# Altium PCB ADCConvert.PcbDoc
Units mm, origin at the board's own origin, x right, y up, seen from the top; angles counter-clockwise.
Board outline 63.5 x 53.34 mm, 2 copper layers (Top Layer, Bottom Layer); 26 components, 19 nets, 70 pads, 4 vias.
Unrouted connection lines stored in the file: 1.
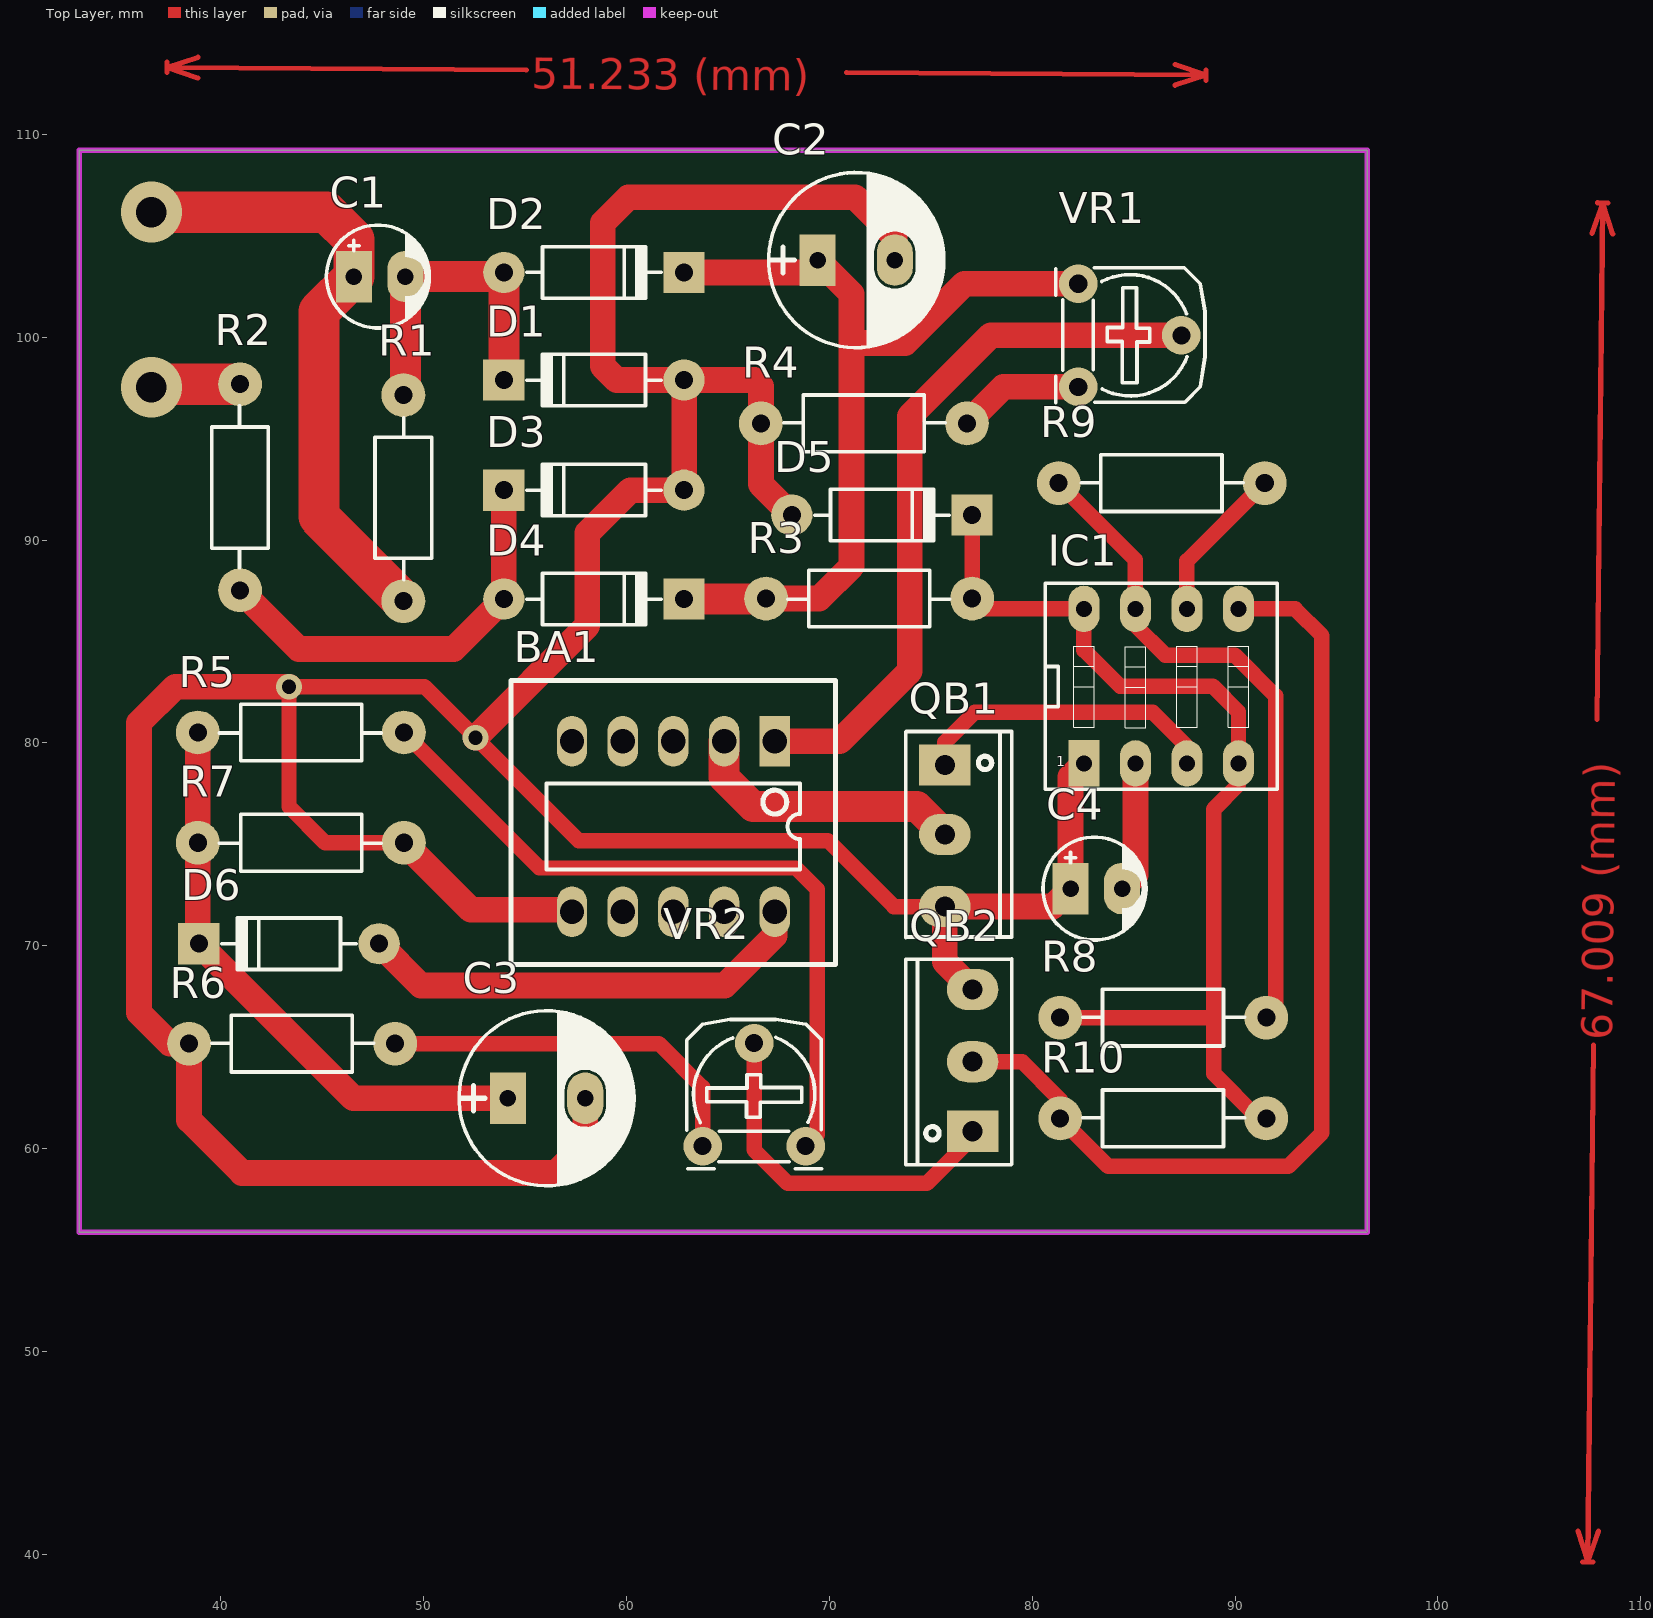
[diagram p0: Top Layer view]
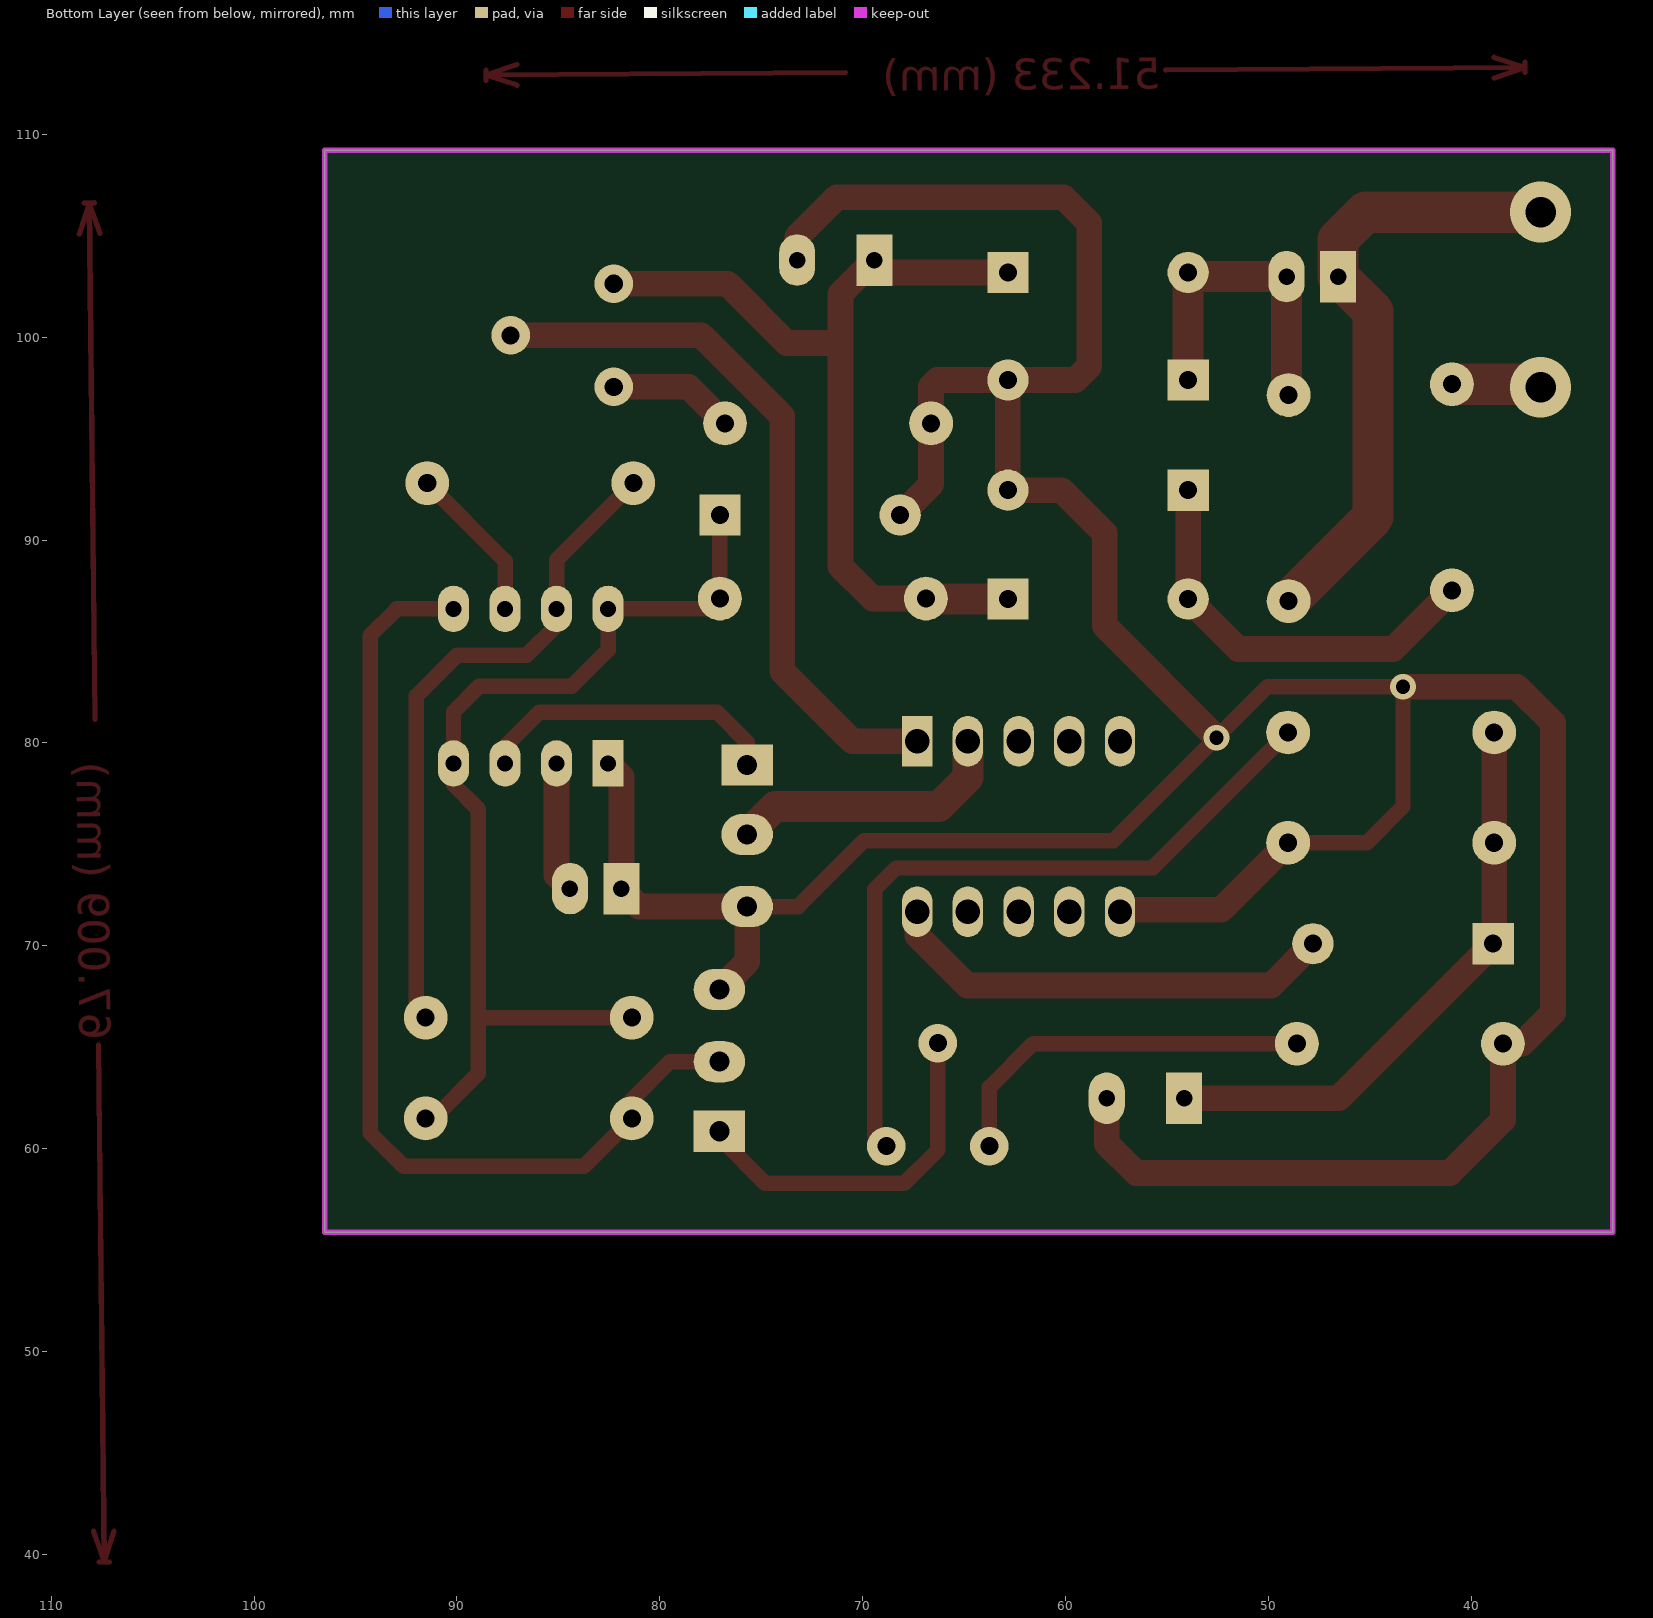
[diagram p1: Bottom Layer view, seen from below]
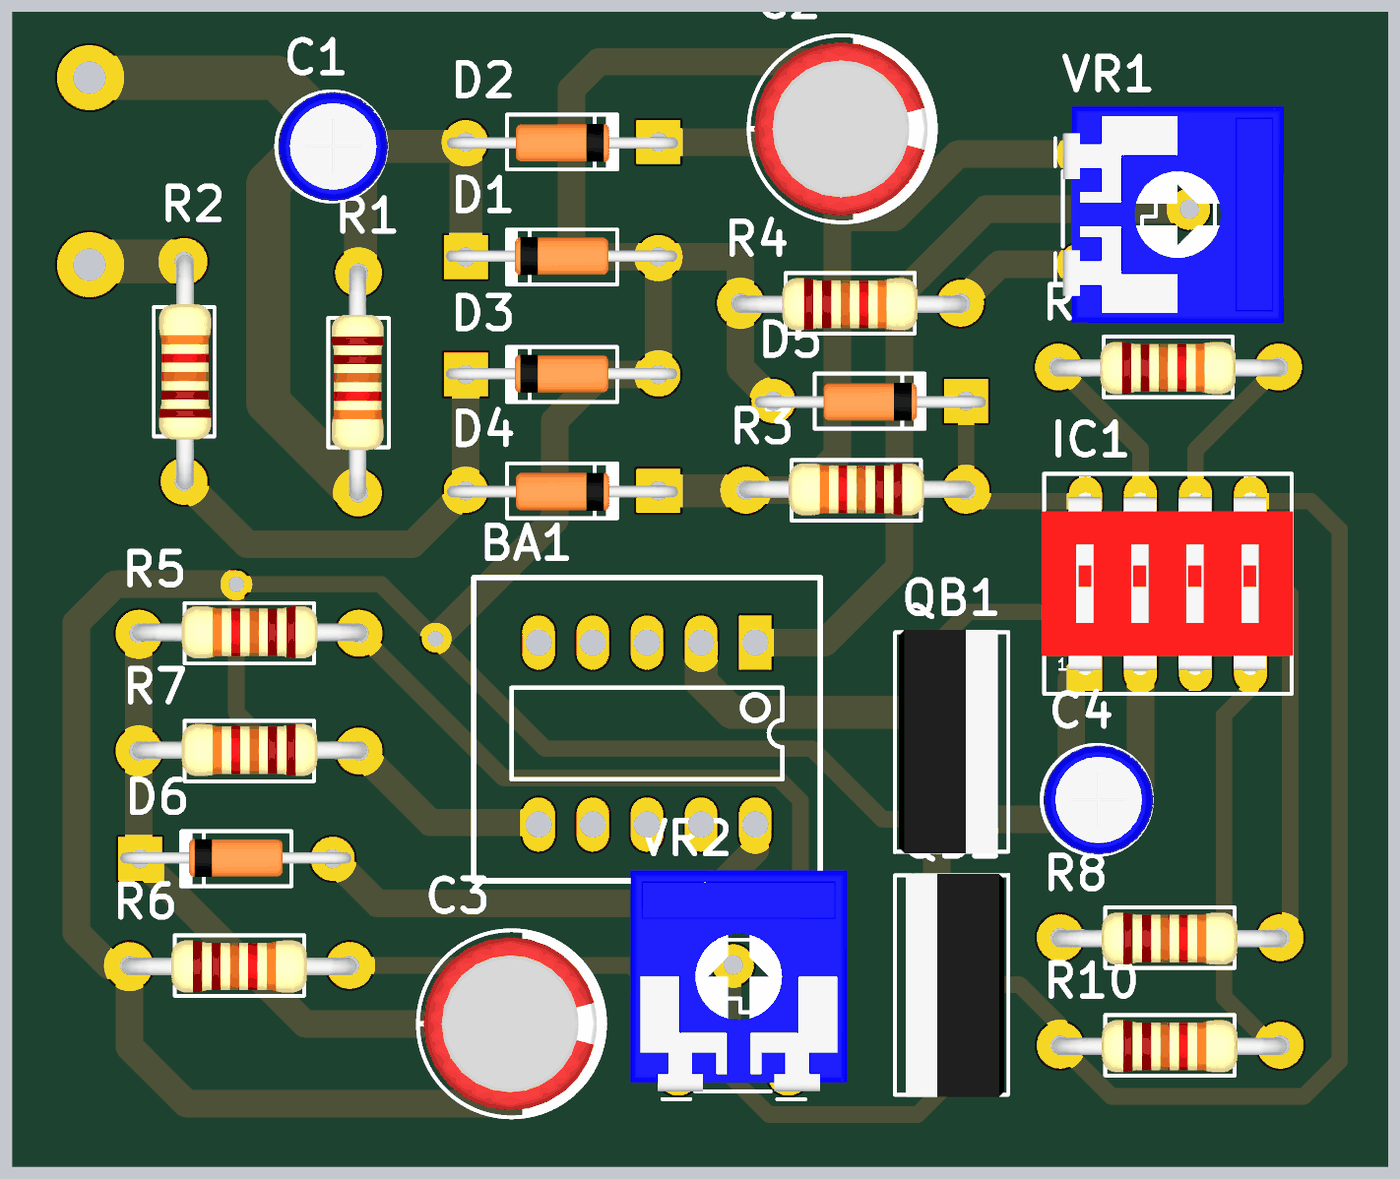
[diagram p2: 3D render of the assembled board from above, using the file's embedded part models]

## Layer stack, top to bottom
Top Solder: solder mask 0.0102, Solder Resist, Dk 3.5
Top Layer: signal copper 0.0356
Dielectric 1: dielectric 0.32, FR-4, Dk 4.8
Bottom Layer: signal copper 0.0356
Bottom Solder: solder mask 0.0102, Solder Resist, Dk 3.5

## Board outline
33.02,55.88 96.52,55.88 96.52,109.22 33.02,109.22

## Design rules (kind name [scope] priority, off if disabled: settings)
Clearance [All] p1: gap=0.254
PolygonConnect [All] p1: connectstyle=Relief reliefconductorwidth=0.254 reliefentries=4 polygonreliefangle="90 Angle" airgapwidth=0.254
RoomDefinition ADCConvert [InComponentClass('ADCConvert')] p1: confinementstyle=ConfineIn formatcopy=TRUE lockcomponents=FALSE outline 0,0 50.8,0 50.8,25.4 0,25.4
RoutingVias [All] p1: holewidth=0.711 width=1.27 viastyle="Through Hole" minholewidth=0.711 minwidth=1.27 maxholewidth=0.711 maxwidth=1.27
SolderMaskExpansion [All] p1: expansion=0.102
Width N1 [InNet('N1')] p1: maxlimit=0.762 minlimit=0.762 preferedwidth=0.762
Width V1 [InNet('V1')] p2: maxlimit=1.27 minlimit=1.27 preferedwidth=1.27
Width V2 [InNet('V2')] p3: maxlimit=1.27 minlimit=1.27 preferedwidth=1.27
Width V7 [InNet('V7')] p4: maxlimit=1.524 minlimit=1.524 preferedwidth=1.524
Width V6 [InNet('V6')] p5: maxlimit=1.524 minlimit=1.524 preferedwidth=1.524
Width V5 [InNet('V5')] p6: maxlimit=1.524 minlimit=1.524 preferedwidth=1.524
Width V4 [InNet('V4')] p7: maxlimit=1.524 minlimit=1.524 preferedwidth=1.524
Width V3 [InNet('V3')] p8: maxlimit=1.524 minlimit=1.524 preferedwidth=1.524
Width V- [InNet('V-')] p9: maxlimit=2.032 minlimit=2.032 preferedwidth=2.032
Width V+ [InNet('V+')] p10: maxlimit=2.032 minlimit=2.032 preferedwidth=2.032
Width [All] p11: maxlimit=1.27 minlimit=0.762 preferedwidth=1.27
30 further rules are at their usual default settings.

## Components (designator, comment, footprint, x,y, rotation, side; value= is the part's Value field where it differs from the comment)
BA1 "EE13" EE1BA 67.31,80.086 r270 top
C1 "220uF/450V" CP1/2 46.558,102.997 r0 top
C2 "220uF/450V" CP1.5/3.4 69.418,103.81 r0 top
C3 "220uF/450V" CP1.5/3.4 54.153,62.484 r0 top
C4 "104" CP1/2 81.89,72.822 r0 top
D1 "1N4007" D1A 62.84,97.892 r0 top
D2 "1N4007" D1A 53.95,103.2 r180 top
D3 "1N4007" D1A 62.84,92.464 r0 top
D4 "1N4007" D1A 53.95,87.097 r180 top
D5 "1N4007" D1A 68.148,91.237 r180 top
D6 "1N4007" D1A 47.803,70.104 r0 top
IC1 "NE555" DIP8/W0.3K 82.55,78.994 r0 top
QB1 "D718" QTO-220T 75.692,78.029 r270 top
QB2 "D718" QTO-220T 77.064,61.747 r90 top
R1 "1k" R1/2W 48.997,86.995 r90 top
R2 "1k" R1/2W 40.945,97.688 r270 top
R3 "1k" R1/2W 66.878,87.122 r0 top
R4 "1k" R1/2W 76.784,95.758 r180 top
R5 "1k" R1/2W 38.862,80.518 r0 top
R6 "1k" R1/2W 48.59,65.176 r180 top
R7 "1k" R1/2W 38.862,75.082 r0 top
R8 "1k" R1/2W 91.542,66.459 r180 top
R9 "1k" R1/2W 91.465,92.812 r180 top
R10 "1k" R1/2W 91.542,61.493 r180 top
VR1 "10K" VR 82.271,102.641 r270 top
VR2 "10K" VR 63.754,60.122 r0 top

## Footprints (in the part's own frame and the unit in brackets; to place one, negate y for a bottom-side part, rotate by r counter-clockwise, add the part's x,y. Pads: shape width x height; smd on the part's side, far side on the other; paste and mask are expansions set on the pad)
CP1.5/3.4 [mil] "Tu hoa 220->470uF,16V, 470uF/16V,25V"
  rect 70x100 hole 32: 1(0,0)
  oval 70x100 hole 32: 2(150,0)
  silkscreen extent -95,-170 245,170, body extent -85,-157 230,157, height 446
CP1/2 [mil] "Tu hoa < 22uF/16>50V"
  rect 70x100 hole 32: 1(0,0)
  oval 70x100 hole 32: 2(100,0)
  silkscreen extent -53,-100 147,100, body extent -49,-99 149,99, height 287
D1A [mil] "Diode 1A, W 100mil, L 350mil"
  round 80 hole 35: 1(0,0)
  rect 80x80 hole 35: 2(-350,0)
  silkscreen extent -305,-50 -45,50, body extent -386,-33 34,36, height 84
DIP8/W0.3K [mil] "8 PIN, W 400mil , L 450mil, Pin to pin 100mil For Switch"
  rect 60x90 hole 31: 1(0,0)
  oval 60x90 hole 31: 2(100,0) 3(200,0) 4(300,0) 5(300,300) 6(200,300) 7(100,300) 8(0,300)
  silkscreen extent -75,-50 375,350, body extent -80,-45 378,345, height 158
EE1BA [mm] "DIP10"
  rect 2.5x1.5 hole 1.2: 1(0,0)
  oval 2.5x1.5 hole 1.2: 2(0,-2.5) 3(0,-5) 4(0,-7.5) 5(0,-10) 6(8.4,-10) 7(8.4,-7.5) 8(8.4,-5) 9(8.4,-2.5) 10(8.4,0)
  silkscreen extent -3,-13 11,3
QTO-220T [mil] "TO-220 - 1-2-3"
  rect 80x100 hole 39: 1(-35,0)
  oval 80x100 hole 39: 2(100,0) 3(240,0)
  silkscreen extent -100,-76 300,130, body extent -104,-69 302,108, height 623
R1/2W [mil] "R 1/2W, 2 pin, 300mil"
  round 85 hole 35: 1(0,0) 2(400,0)
  silkscreen extent 42,-55 356,55, body extent -12,-45 414,49, height 91
VR [mil] "Resistor Variable"
  round 75 hole 35: 1(0,0) 2(100,200) 3(200,0)
  silkscreen extent -31,-44 231,246, body extent -87,-30 307,372, height 165

## Part data
BA1: library part EE13-Tranformer
C1 C2 C3: library part CP9, "Cap 10000uF/63V"
C4: library part CN2, "Cap np 104 => 105pF"
D1 D2 D3 D4 D5 D6: library part D1A, "Diode 1A"
QB1 QB2: "Transistor Power Supply"
R1 R2 R3 R4 R5 R6 R7 R8 R9 R10: library part R, "Resistor 1/4W"
VR1 VR2: library part VR, "Var Resistor"

## Via types
v1: diameter 1.27, hole 0.711, Top Layer to Bottom Layer, 2 vias
v2: diameter 3, hole 1.5, Top Layer to Bottom Layer, 2 vias

## Nets (pads, with @x,y where several pads share a name; then routed paths per layer and width w, separated by ;. In a path a pad name is that pad's centre, name@x,y a point inside that pad or via, vN(x,y) a via of type N, cw(c..) or ccw(c..) an arc to the next point about the centre after c; other vN are vias at no path point)
GND: BA1.6 C2.2 C3.2 C4.1 D1.1 D3.1 D5.1 IC1.1 QB1.3 QB2.3 R4.2 R6.2 R7.2 | length 191.8
  Top Layer w0.762: R7.2 45.136,75.082 43.358,76.86 v1(43.358,82.779) 50.038,82.779 v1(52.553,80.264) 57.633,75.184 69.926,75.184 73.177,71.933 QB1.3
  Top Layer w1.27: v1(43.358,82.779) 37.744,82.779 35.966,81.001 35.966,66.7 37.49,65.176 R6.2 38.43,61.417 41.046,58.801 56.515,58.801 57.963,60.249 C3.2 ; R7.2 52.324,71.78 57.216,71.78 BA1.6 ; v1(52.553,80.264) 58.064,85.776 58.064,90.348 60.181,92.464 D3.1 D1.1 ; D5.1 66.624,92.761 R4.2 66.624,97.587 66.319,97.892 D1.1 ; C2.2 73.228,104.953 71.272,106.909 60.096,106.909 58.826,105.639 58.826,98.577 59.512,97.892 D1.1 ; QB2.3 75.692,69.215 QB1.3 81.001,71.933 C4.1 81.89,78.334 IC1.1
N1: D5.2 IC1.4 IC1.8 R3.2 R8.2 R10.1 | length 50.2
  Top Layer w0.762: D5.2 R3.2 77.546,86.614 IC1.8 82.55,84.582 84.328,82.804 88.9,82.804 90.17,81.534 IC1.4 90.17,77.953 88.951,76.733 88.951,66.446 ; R8.2 88.938,66.459 88.951,66.446 ; R10.1 91.161,61.493 88.951,63.703 88.951,66.446
N2: IC1.3 QB1.1 | length 15.2
  Top Layer w0.762: QB1.1 75.692,80.035 77.165,81.509 85.954,81.509 87.63,79.832 IC1.3
N3: QB2.1 VR2.2 | length 18
  Top Layer w0.762: VR2.2 66.294,59.944 67.945,58.293 74.803,58.293 77.064,60.554 QB2.1
NetC4_2: C4.2 IC1.2 IC1.6 R9.1 | length 14.2
  Top Layer w0.762: IC1.6 87.63,88.976 R9.1
  Top Layer w1.27: C4.2 85.09,73.482 IC1.2
NetIC1_5: IC1.5 QB2.2 R10.2 | length 49.7
  Top Layer w0.762: QB2.2 79.502,64.287 81.382,62.408 R10.2 83.744,59.131 92.634,59.131 94.285,60.782 94.285,85.293 92.964,86.614 IC1.5
NetIC1_7: IC1.7 R8.1 R9.2 | length 33
  Top Layer w0.762: R9.2 85.09,89.027 IC1.7 85.09,85.801 86.563,84.328 89.992,84.328 91.999,82.321 91.999,66.916 R8.1 R8.1@91.567,66.459
NetR4_1: R4.1 VR1.3 | length 6.2
  Top Layer w1.27: R4.1 78.588,97.561 VR1.3
NetR5_2: R5.2 VR2.3 | length 36.6
  Top Layer w0.762: R5.2 55.702,73.838 68.351,73.838 69.393,72.796 69.393,60.681 VR2.3
  Top Layer w1.27: VR2.3 VR2.3@68.936,60.122
NetR6_1: R6.1 VR2.1 | length 19.4
  Top Layer w0.762: R6.1 61.595,65.176 63.754,63.017 VR2.1
  Top Layer w1.27: R6.1 R6.1@48.92,64.846
V1: BA1.10 D6.1 | length 22.6
  Top Layer w1.27: D6.1 49.86,68.047 64.846,68.047 67.31,70.51 BA1.10
V2: C3.1 D6.2 R5.1 R7.1 | length 28.8
  Top Layer w1.27: R5.1 R7.1 38.862,70.155 D6.2 46.533,62.484 C3.1
V3: C1.2 D1.2 D2.1 R1.2 | length 16.1
  Top Layer w1.524: R1.2 49.098,97.257 C1.2 53.746,102.997 D2.1 D1.2
V4: D3.2 D4.1 R2.2 | length 20.6
  Top Layer w1.27: R2.2 43.84,84.633 51.486,84.633 D4.1 D3.2
V5: C2.1 D2.2 D4.2 R3.1 VR1.1 | length 43.9
  Top Layer w1.27: D2.2 68.809,103.2 C2.1 71.095,102.133 71.095,99.72 ; R3.1 69.494,87.122 71.095,88.722 71.095,99.72 ; VR1.1 76.657,102.641 73.736,99.72 71.095,99.72
  Top Layer w1.524: D4.2 66.853,87.097 R3.1
V6: BA1.1 VR1.2 | length 35.7
  Top Layer w1.27: BA1.1 70.51,80.086 73.965,83.541 73.965,96.114 77.953,100.101 VR1.2
V7: BA1.2 QB1.2 | length 13.8
  Top Layer w1.524: BA1.2 64.81,78.294 66.243,76.86 74.32,76.86 QB1.2
V+: C1.1 R1.1 | length 30.8
  Top Layer w2.032: v2(36.576,106.172) 45.212,106.172 46.558,104.826 C1.1 44.831,101.27 44.831,91.161 R1.1
V-: R2.1 | length 4.4
  Top Layer w2.032: v2(36.576,97.536) 36.728,97.688 R2.1
pads on no net: BA1.3 BA1.4 BA1.5 BA1.7 BA1.8 BA1.9
copper on no net: | length 101.3
  Top Layer w0.254: 37.336,113.055 37.34,113.563 ; 38.858,112.79 37.338,113.309 ; 38.866,113.806 37.338,113.309 ; 55.057,113.178 37.338,113.309 ; 70.851,113.06 88.57,112.928 ; 87.042,112.432 88.57,112.928 ; 87.05,113.448 88.57,112.928 ; 88.568,112.674 88.572,113.182 ; 106.9,41.153 107.391,39.624 ; 107.137,39.627 107.645,39.621 ; 107.603,105.111 108.128,106.629 ; 107.671,65.103 107.391,39.624 ; 107.848,81.15 108.128,106.629 ; 107.874,106.632 108.382,106.626 ; 107.916,41.142 107.391,39.624 ; 108.619,105.1 108.128,106.629

## Keep-outs
Keep-Out Layer:
  the board outline again, w0.254

## Other copper
Top Layer:
  text "51.233 (mm)" at 55.304,112.262 h1.52 r359.57
  text "67.009 (mm)" at 108.588,65.347 h1.52 r89.37

## Text inside footprints (layer, text, board x,y; h text height)
IC1: Top Overlay "1" at 81.178,78.842 h0.51